# Altium PCB MCPS Supply 030601.PcbDoc
Units mm, origin at the board's own origin, x right, y up, seen from the top; angles counter-clockwise.
Board outline 142.99 x 138.8 mm, 2 copper layers (Top Layer, Bottom Layer); 73 components, 47 nets, 185 pads, 18 vias.
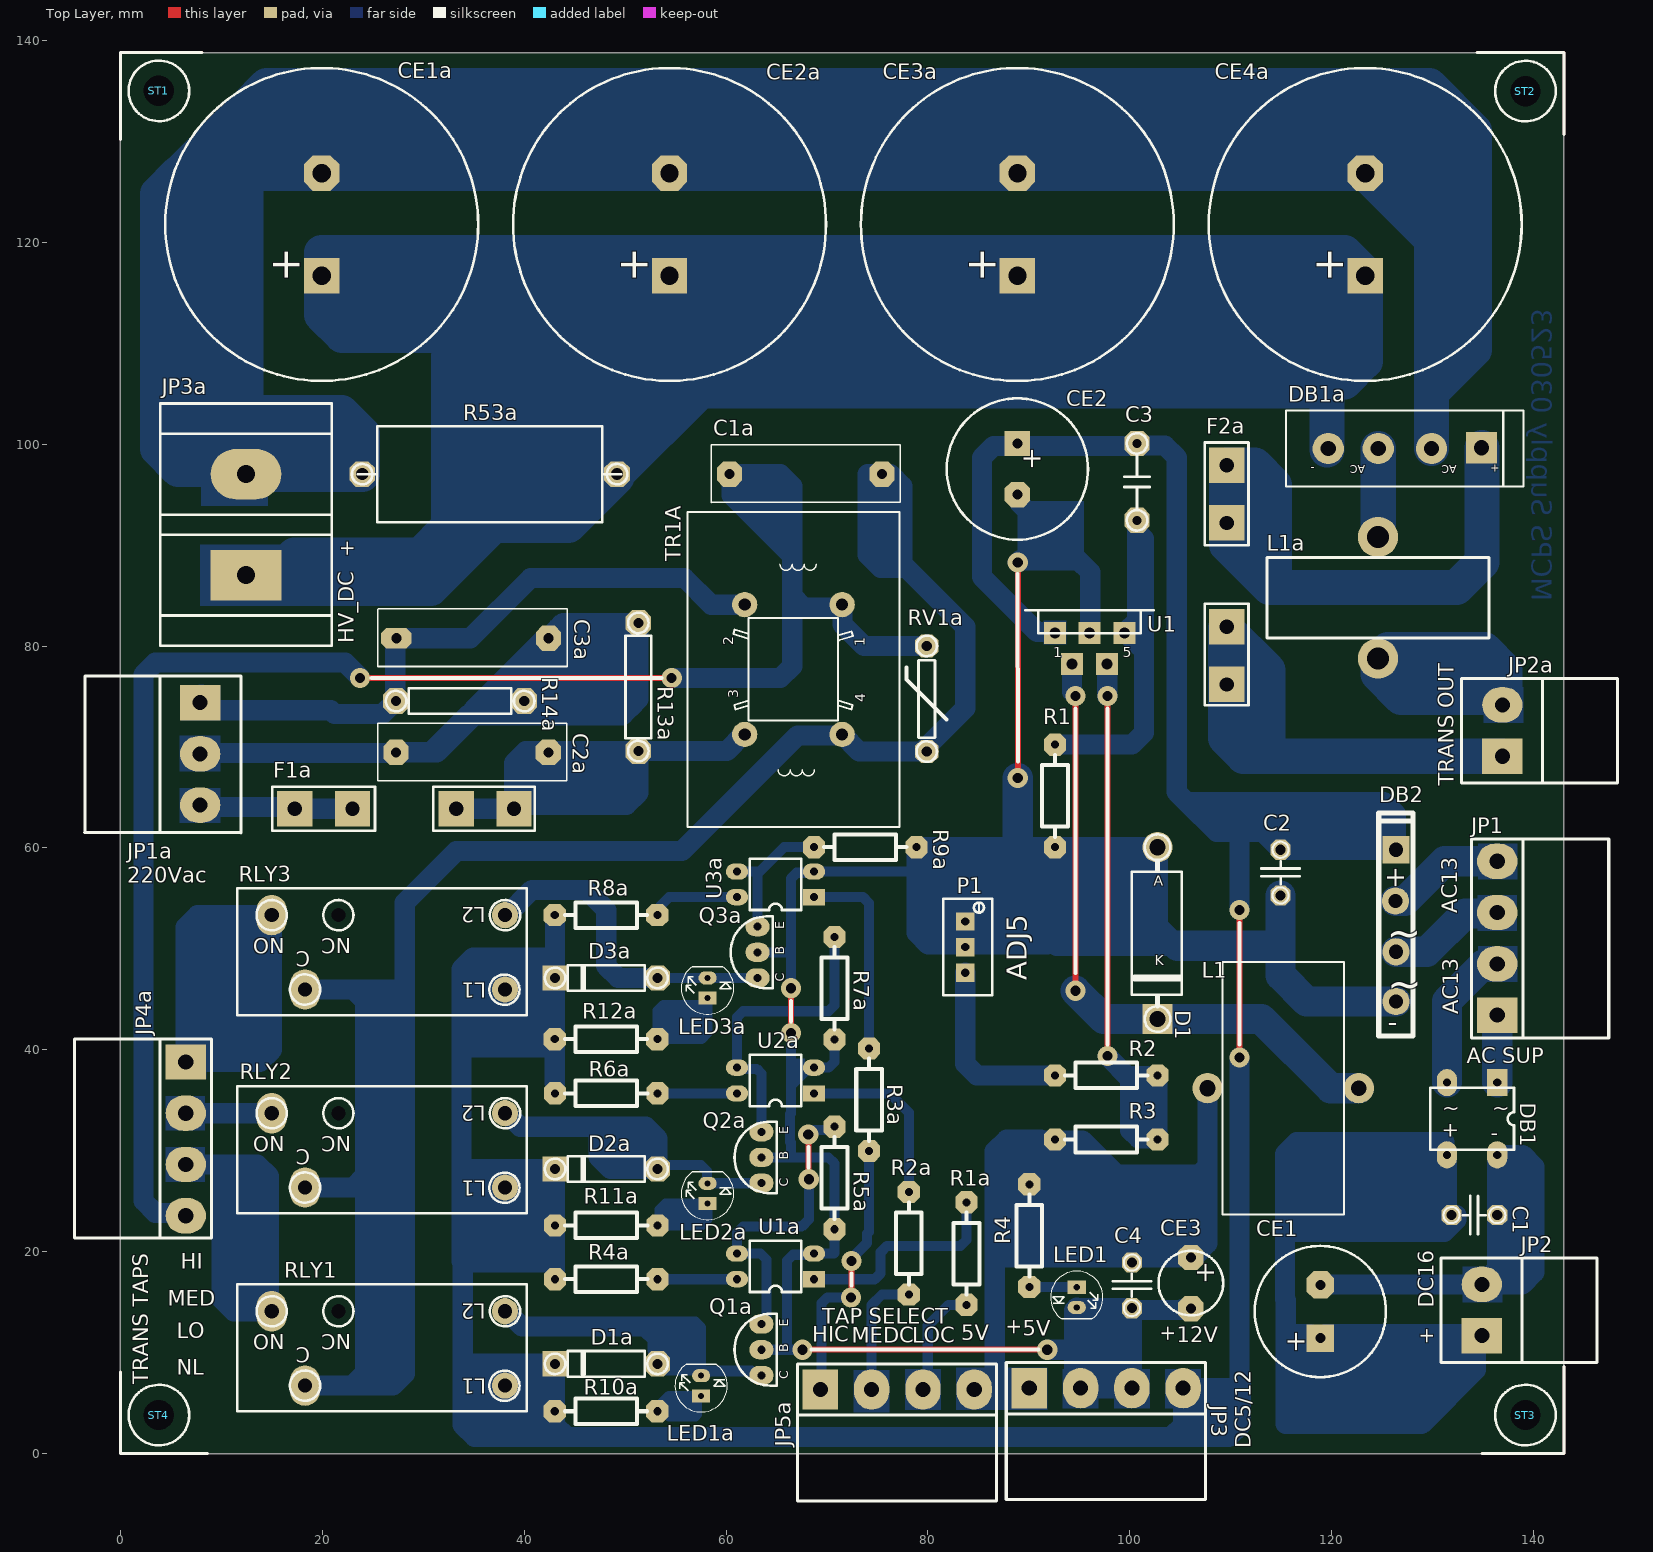
[diagram p0: Top Layer view]
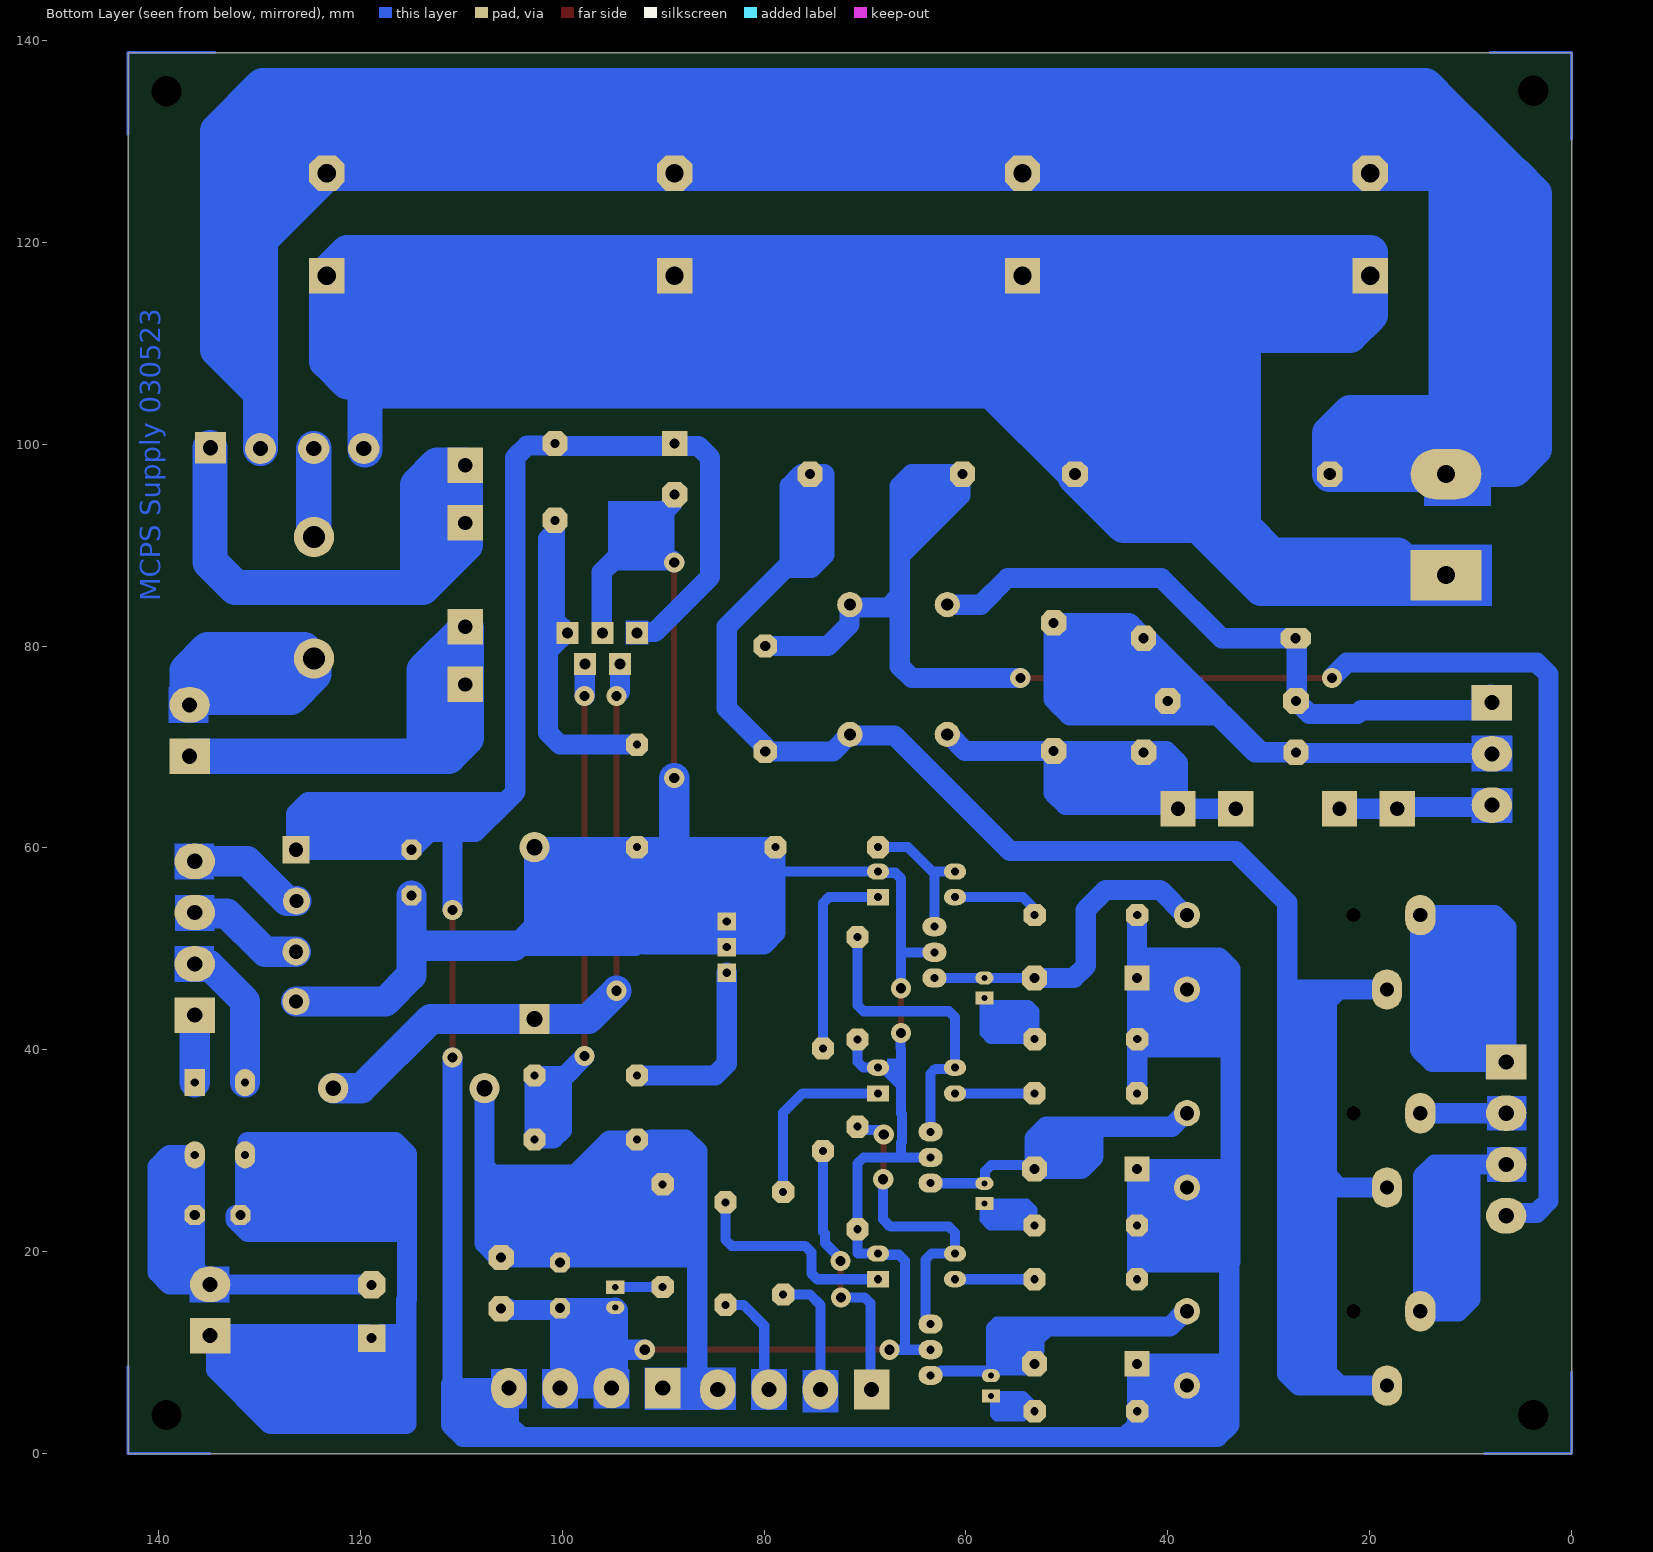
[diagram p1: Bottom Layer view, seen from below]

## Layer stack, top to bottom
Top Solder: solder mask 0.0102, Solder Resist, Dk 3.5
Top Layer: signal copper 0.0356
Dielectric1: dielectric 0.32, FR-4, Dk 4.8
Bottom Layer: signal copper 0.0356
Bottom Solder: solder mask 0.0102, Solder Resist, Dk 3.5

## Board outline
0,0 142.989,0 142.989,138.797 0,138.797

## Design rules (kind name [scope] priority, off if disabled: settings)
Clearance [All] p1: gap=0.3 ignorepadtopadclearanceinfootprint=FALSE except(0.5: Arc-Arc Arc-Track Track-Track)
ComponentClearance [All] p1 off: gap=0.254 collisioncheckmode=3 verticalgap=0.254 showdistances=FALSE
PolygonConnect [All] p1: connectstyle=Direct reliefconductorwidth=1 reliefentries=4 polygonreliefangle="90 Angle" airgapwidth=0.3
RoutingVias [All] p1: holewidth=0.711 width=1.27 viastyle="Through Hole" minholewidth=0.711 minwidth=1.27 maxholewidth=0.711 maxwidth=1.27
SilkToSolderMaskClearance SilkscreenOverComponentPads [IsPad] p1: minsilkscreentomaskgap=0.254 clearancetoexposedcopper=TRUE
SolderMaskExpansion [All] p1: expansion=0.102 istentingtop=FALSE
UnRoutedNet [All] p1: checkbadconnections=TRUE
Width [All] p1: maxlimit=5 minlimit=0.3 preferedwidth=0.7 minimp=50.000000 maximp=50.000000 favimp=50.000000
27 further rules are at their usual default settings.

## Components (designator, comment, footprint, x,y, rotation, side; value= is the part's Value field where it differs from the comment)
C1 "100N" c1.8p 131.877,23.622 r0 top locked
C1a "47N/275" 47N/275#1 75.438,97.028 r0 top locked
C2 "100N" c1.8p 114.935,59.817 r270 top locked
C2a "47N/275" 47N/275#1 42.393,69.469 r0 top locked
C3 "100N" C3P 100.711,100.076 r270 top locked
C3a "47N/275" 47N/275#2 42.418,80.772 r0 top locked
C4 "100N" c1.8p 100.203,18.923 r270 top locked
CE1 "1000M/25" CAP1000M/25V 118.872,14.072 r180 top locked
CE1a "1200M/250V" "CAP 1200M/250" 19.939,121.766 r180 top locked
CE2 "2200M/25" "CAP 2200/25" 88.858,100.076 r0 top locked
CE2a "1200M/250V" "CAP 1200M/250" 54.398,121.766 r180 top locked
CE3 "1000M/63" CAP2P 106.045,19.431 r0 top locked
CE3a "1200M/250V" "CAP 1200M/250" 88.858,121.766 r180 top locked
CE4a "1200M/250V" "CAP 1200M/250" 123.317,121.766 r180 top locked
D1 "1N5822" d54 102.743,60.071 r0 top locked
D1a "1N5819" D4P 53.213,8.89 r0 top locked
D2a "1N5819" D4P 53.213,28.194 r0 top locked
D3a "1N5819" D4P 53.213,47.117 r0 top locked
DB1 "200V/1A" "BRG 1A" 133.909,33.172 r0 top locked
DB1a "600V/6A" "BRIDGE 6A" 127.254,99.568 r180 top locked
DB2 "200V/2A" "BRG GBU" 126.365,44.78 r0 top locked
F1a "1A5" FS 17.272,63.881 r0 top locked
F2a "5A" FS 109.601,97.917 r270 top locked
JP1 "AC SUP" 4EDG 136.398,43.434 r270 top locked
JP1a "220Vac" 3EDG-STR 7.874,74.422 r90 top locked
JP2 "DC16" 2edg-str 134.874,11.684 r270 top locked
JP2a "TRANS OUT" 2edg-str 136.906,69.088 r270 top locked
JP3 "DC5/12" 4EDG 90.043,6.477 r180 top locked
JP3a "HV_DC" DG55X2 12.446,87.028 r90 top locked
JP4a "TRANS TAPS" 4EDG 6.477,38.798 r90 top locked
JP5a "TAP SELECT" 4EDG 69.342,6.35 r180 top locked
L1 "100UH" "inductor 2512" 115.189,36.195 r0 top locked
L1a "10mH/5A" "INDUCTOR 2208" 124.587,90.805 r0 top locked
LED1 "Red" LED-5mm 94.752,16.478 r0 top locked
LED1a "LED" LED-5mm 57.521,5.715 r180 top locked
LED2a "LED" LED-5mm 58.156,24.765 r180 top locked
LED3a "LED" LED-5mm 58.156,45.117 r180 top locked
P1 "1K" "pot multi turn" 83.693,52.695 r180 top locked
Q1a "BC337" CBE-BC546 63.5,12.827 r180 top locked
Q2a "BC337" CBE-BC546 63.5,31.877 r180 top locked
Q3a "BC337" CBE-BC546 63.119,52.197 r180 top locked
R1 "10K%" R4P 92.583,70.231 r0 top locked
R1a "560R" R4P 83.82,24.892 r0 top locked
R2 "3K%" R4P 102.743,37.465 r270 top locked
R2a "560R" R4P 78.105,25.908 r0 top locked
R3 "10K%" R4P 92.583,31.115 r90 top locked
R3a "560R" R4P 74.168,40.132 r0 top locked
R4 "1K" R4P 90.043,26.67 r0 top locked
R4a "4K7" R4P 53.213,17.272 r270 top locked
R5a "10K" R4P 70.739,32.385 r0 top locked
R6a "4K7" R4P 53.213,35.687 r270 top locked
R7a "10K" R4P 70.739,51.181 r0 top locked
R8a "4K7" R4P 53.19,53.34 r270 top locked
R9a "10K" R4P 68.707,60.071 r90 top locked
R10a "1K8" R4P 43.03,4.191 r90 top locked
R11a "1K8" R4P 43.053,22.606 r90 top locked
R12a "1K8" R4P 43.03,41.053 r90 top locked
R13a "470K" R5P 51.308,69.596 r90 top locked
R14a "470K" R5P 40.005,74.549 r180 top locked
R53a "22K/5W" R5W 36.576,97.028 r0 top locked
RLY1 "12V/10A" RLY16D 26.543,10.414 r180 top locked
RLY2 "12V/10A" RLY16D 26.543,30.035 r180 top locked
RLY3 "12V/10A" RLY16D 26.543,49.657 r180 top locked
RV1a "250Vrms" "VARISTOR 3" 79.883,80.01 r0 top locked
ST1 "STUD" CORNER 0,138.811 r0 top locked
ST2 "STUD" CORNER 143.002,138.784 r270 top locked
ST3 "STUD" CORNER 143.002,0 r180 top locked
ST4 "STUD" CORNER 0,0 r90 top locked
TR1A "CMT" CMT1 71.501,71.247 r270 top locked
U1 "LM2576T-ADJ" PENTA1 92.583,81.28 r90 top locked
U1a "PC817" DIP4 68.707,17.272 r180 top locked
U2a "PC817" DIP4 68.707,35.687 r180 top locked
U3a "PC817" DIP4 68.707,55.118 r180 top locked

## Footprints (in the part's own frame and the unit in brackets; to place one, negate y for a bottom-side part, rotate by r counter-clockwise, add the part's x,y. Pads: shape width x height; smd on the part's side, far side on the other; paste and mask are expansions set on the pad)
2edg-str [mm]
  rect 3.5x4 hole 1.5: 1(0,0)
  oval 3.5x4 hole 1.5: 2(-5.08,0)
  silkscreen extent -7.7,-4.06 2.64,11.43
3EDG-STR [mm]
  rect 3.5x4 hole 1.5: 1(-0.025,-0.025)
  oval 3.5x4 hole 1.5: 2(-5.105,-0.025) 3(-10.185,-0.025)
  silkscreen extent -12.93,-4.09 2.62,11.41
4EDG [mm]
  rect 3.5x4 hole 1.5: 1(0,0)
  oval 3.5x4 hole 1.5: 2(-5.08,0) 3(-10.16,0) 4(-15.24,0)
  silkscreen extent -17.44,-2.54 2.29,11.05
47N/275#1 [mm]
  oct 2.5x2.5 hole 1: 1(0,0) 2(-15.088,0)
  silkscreen extent -16.92,-2.81 1.83,2.9
47N/275#2 [mm]
  oct 2.5x2.5 hole 1: 1(0,0)
  oct 3x2 hole 1: 2(-15.088,0)
  silkscreen extent -16.92,-2.81 1.83,2.9
"BRG 1A" [mm]
  rect 2x2.7 hole 0.8: 1(2.489,3.581)
  oval 2x2.7 hole 0.8: 2(2.489,-3.581) 3(-2.489,3.581) 4(-2.489,-3.581)
  silkscreen extent -4.15,-3.09 4.15,3.07
"BRG GBU" [mm]
  round 2.7 hole 1.4: 1(0,4.928) 2(0,0) 3(-0.051,9.957)
  rect 2.7x2.7 hole 1.4: 4(0,15.037)
  silkscreen extent -1.7,-3.41 1.7,18.69
"BRIDGE 6A" [mm]
  rect 3.1x3.1 hole 1.5: 1(-7.595,-0.076)
  round 3.1 hole 1.5: 2(-2.642,0) 3(2.642,0) 4(7.595,0)
  silkscreen extent -11.74,-3.75 11.76,3.75
c1.8p [mm]
  oct 2x2 hole 1: 1(0,0) 2(4.521,0)
  silkscreen extent -0.8,-1.91 5.32,1.9
C3P [mm]
  oct 2.5x2.5 hole 0.9: 1(0,0) 2(7.62,0)
  silkscreen extent -1.02,-1.27 8.64,1.27
CAP2P [mm]
  oct 2.5x2.5 hole 1: 1(0,0) 2(0,-5.08)
  silkscreen extent -3.2,-5.74 3.2,0.66
CAP1000M/25V [mm]
  rect 2.7x2.7 hole 1: 1(0,2.642)
  oct 2.7x2.7 hole 1: 2(0,-2.642)
  silkscreen extent -6.5,-6.5 6.5,6.5
"CAP 1200M/250" [mm]
  rect 3.5x3.5 hole 1.8: 1(0,5.08)
  oct 3.5x3.5 hole 1.8: 2(0,-5.08)
  silkscreen extent -15.5,-15.5 15.5,15.5
"CAP 2200/25" [mm]
  rect 2.5x2.5 hole 1: 1(0,0)
  oct 2.5x2.5 hole 1: 2(0,-5.08)
  silkscreen extent -7,-9.54 7,4.46
CBE-BC546 [mm]
  oval 2.4x1.9 hole 0.8: 1(0,2.54) 2(0,0) 3(0,5.08)
  silkscreen extent -1.52,-1.02 2.67,6.1
CMT1 [mm]
  round 2.5 hole 1.2: 1(-12.852,0) 2(-12.852,-9.652) 3(0,-9.652) 4(0,0)
  silkscreen extent -22.02,-15.34 9.17,5.69
CORNER [mm]
  round 2 hole 3: 1(3.81,-3.81)
  Multi-Layer lines w0.3: 0,-8.623 0,0.013 8.09,0.013
  silkscreen extent 0,-8.62 8.09,0.01
D4P [mm]
  oct 2.5x2.5 hole 1: 1(0,0)
  rect 2.5x2.5 hole 1: 2(-10.16,0)
  silkscreen extent -11.17,-1.27 1.02,1.27
d54 [mm]
  round 3 hole 1.6: 1(0,0)
  rect 3x3 hole 1.6: 2(0,-17.018)
  silkscreen extent -2.54,-18.29 2.41,1.27
DG55X2 [mm]
  rect 5x7 hole 1.8: 1(0,0)
  oval 5x7 hole 1.8: 2(10,0)
  silkscreen extent -7,-8.5 17,8.5
DIP4 [mm]
  rect 2.2x1.6 hole 0.8: 1(0,0)
  oval 2.2x1.6 hole 0.8: 2(0,-2.54) 3(7.62,-2.54) 4(7.62,0)
  silkscreen extent 1.27,-3.81 6.35,1.27
FS [mm]
  rect 3.5x3.5 hole 1.4: 1(0,0) 2(21.717,0) ""(5.715,0) ""(16.002,0)
  silkscreen extent -2.25,-2.16 23.76,2.16
"INDUCTOR 2208" [mm]
  round 4 hole 2.2: 1(0,0) 2(0,-12.04)
  silkscreen extent -11,-10.01 11,-2.03
"inductor 2512" [mm]
  round 3 hole 1.6: 1(-7.493,0)
  round 3 hole 1.5: 2(7.493,0)
  silkscreen extent -6.02,-12.52 6.02,12.52
LED-5mm [mm]
  rect 1.8x1.3 hole 0.6: 1(-0.01,0)
  oval 1.8x1.3 hole 0.6: 2(-0.01,-2)
  silkscreen extent -2.61,-3.13 2.59,1.6
PENTA1 [mm]
  rect 2.2x2.2 hole 1.1: 1(0,0) 2(-3.048,-1.702) 3(0,-3.429) 4(-3.048,-5.156) 5(0,-6.883)
  silkscreen extent 0,-9.78 2.29,2.92
"pot multi turn" [mm]
  rect 1.8x1.8 hole 0.8: 1(0,5.06) 2(0,0) 3(0,2.53)
  silkscreen extent -2.67,-2.29 2.18,7.29
R4P [mm]
  oct 2.2x2.2 hole 0.8: 1(0,0) 2(0,-10.16)
  silkscreen extent -1.27,-9.14 1.27,-1.02
R5P [mm]
  oct 2.54x2.54 hole 1: 1(0,0) 2(12.7,0)
  silkscreen extent -1.02,-1.27 13.72,1.27
R5W [mm]
  oct 2.54x2.54 hole 1.2: 1(-12.624,0) 2(12.624,0)
  silkscreen extent -13.64,-4.75 13.64,4.75
RLY16D [mm]
  oval 3x4 hole 1.4: 1(8.255,3.683) 2(11.557,-3.683)
  round 1 hole 1.4: 3(4.953,-3.683)
  round 2.6 hole 1.4: 4(-11.557,-3.683) 5(-11.557,3.683)
  silkscreen extent -13.72,-6.35 14.99,6.22
"VARISTOR 3" [mm]
  oct 2.3x2.3 hole 1: 1(0,-10.465) 2(0,0)
  silkscreen extent -2.01,-11.48 1.95,1.02

## Part data
C1 C1a C2 C2a C3 C3a C4: library part C
CE1 CE1a CE2 CE2a CE3 CE3a CE4a: library part E
D1: library part Diode, "Default Diode", Code_JEDEC=DO-214-AB, LatestRevisionDate=17-Jul-2002, LatestRevisionNote="Re-released for DXP Platform.", PackageDescription="DO-214-AB/SMC; 2 C-Bend Leads; Body 7.9 x 5.9 mm, inc. leads (LxW)", PackageReference=SMC, PackageVersion=Sep-1996, Published=8-Jun-2000, Publisher="Altium Limited"
D1a D2a D3a: library part D
DB1 DB1a DB2: library part BRIDGE
F1a F2a: library part FUSE1
JP1 JP3 JP4a JP5a: library part "Header 4", "Header, 4-Pin", LatestRevisionDate=17-Jul-2002, LatestRevisionNote="Re-released for DXP Platform.", Publisher="Altium Limited"
JP1a: library part "Header 3", "Header, 3-Pin", LatestRevisionDate=17-Jul-2002, LatestRevisionNote="Re-released for DXP Platform.", Publisher="Altium Limited"
JP2 JP2a JP3a: library part "Header 2", "Header, 2-Pin", LatestRevisionDate=17-Jul-2002, LatestRevisionNote="Re-released for DXP Platform.", Publisher="Altium Limited"
L1: library part "INDUCTOR IRON"
L1a: library part INDUCTOR
LED1: library part LED, "LED", Adding Date=1387/12/22, Color=Red, Designer="Saeid Jorablo", Organazation=ControTec, Size="SMD 1206"
LED1a LED2a LED3a: "LED LIGHTING", Data=16-12-2016, Designer="Abbas Basereh"
P1: library part POT2
Q1a Q2a Q3a: library part N
R1 R1a R2 R2a R3 R3a R4 R4a R5a R6a R7a R8a R9a R10a R11a R12a R13a R14a R53a: library part R
RLY1 RLY2 RLY3: library part RELAY-SPST4
RV1a: library part VARISTOR
TR1A: library part TRANS1
U1: library part LM2576
U1a U2a U3a: library part OPTODIP4

## Via types
v1: diameter 2, hole 1, Top Layer to Bottom Layer, 18 vias

## Nets (pads, with @x,y where several pads share a name; then routed paths per layer and width w, separated by ;. In a path a pad name is that pad's centre, name@x,y a point inside that pad or via, vN(x,y) a via of type N, cw(c..) or ccw(c..) an arc to the next point about the centre after c; other vN are vias at no path point)
5V: C4.1 CE3.1 JP3.1 JP5a.4 L1.1 R3.1 R4.1 | length 132.3
  Bottom Layer w2: JP5a.4 84.645,6.413 86.868,6.413 ; 86.868,6.858 89.662,6.858 JP3.1 ; 87.312,6.413 86.614,7.112 86.614,19.177 ; 91.191,31.115 87.786,31.115 86.614,29.943 86.614,25.398 ; 96.462,23.79 94.615,25.636 94.615,31.015 ; L1.1 107.696,28.448 ; 86.614,19.177 86.614,25.398 ; 86.614,19.177 86.868,19.431 93.726,19.431 ; 86.614,25.398 87.786,26.57 89.943,26.57 R4.1 ; R4.1 90.019,26.694 90.019,29.843 91.191,31.015 92.483,31.015 R3.1 92.683,31.015 94.615,31.015 ; R4.1 90.043,23.114 93.726,19.431 ; 93.726,19.431 99.695,19.431 C4.1 ; 94.615,31.015 95.326,31.015 98.726,27.615 100.203,27.615 ; C4.1 100.203,25.781 ; C4.1 100.711,19.431 105.795,19.431 105.918,19.554 105.918,19.558 CE3.1 106.256,19.642 106.524,19.642 107.696,20.813 107.696,25.781 ; 100.203,25.781 100.203,27.615 ; 100.203,25.781 107.696,25.781 ; 100.203,27.615 106.863,27.615 107.696,28.448 ; 107.696,25.781 107.696,28.448
12V: C2.1 C3.1 CE2.1 D1a.2 D2a.2 D3a.2 DB2.4 JP3.4 R4a.2 R6a.2 R8a.2 R10a.1 R11a.1 R12a.1 RLY1.5 RLY2.5 RLY3.5 U1.1 | length 451.3
  Top Layer w0.6: v1(110.871,39.243) v1(110.871,53.848)
  Bottom Layer w2: RLY1.5 38.1,5.363 39.272,4.191 ; R8a.2 43.042,53.328 43.042,49.022 ; R12a.1@43.042,41.053 43.042,47.117 39.405,47.117 38.262,45.974 RLY3.5 38.1,42.224 39.272,41.053 R12a.1 ; D3a.2@43.042,47.882 43.042,49.022 ; R4a.2 43.053,18.923 ; R6a.2 43.053,36.703 43.03,36.726 R12a.1 ; U1.1 92.483,81.38 90.832,81.38 85.344,86.868 85.344,98.654 86.516,99.826 88.608,99.826 CE2.1 89.108,99.826 90.193,99.826 90.197,99.822 100.418,99.822 100.672,100.076 C3.1 100.922,99.865 103.476,99.865 104.648,98.694 104.648,65.532 105.639,64.541 ; v1(110.871,39.243) 110.871,6.731 ; v1(110.871,53.848) 110.871,61.595 ; 110.998,6.477 110.998,2.823 109.826,1.651 104.111,1.651 ; 110.998,6.858 110.871,6.731 ; 33.782,23.778 33.782,28.321 ; 33.782,23.778 33.782,19.05 33.909,18.923 ; 33.782,23.778 34.954,22.606 39.272,22.606 ; 33.782,28.321 33.909,28.194 D2a.2 ; 33.782,28.321 33.782,40.259 ; 33.782,40.259 33.782,47.977 34.954,49.149 42.915,49.149 43.042,49.022 ; 33.782,40.259 42.236,40.259 R12a.1 ; 33.909,5.236 33.909,2.823 35.081,1.651 44.225,1.651 ; 33.909,5.236 34.954,4.191 39.272,4.191 ; 33.909,5.236 33.909,9.398 ; 33.909,9.398 34.417,8.89 D1a.2 ; 33.909,9.398 33.909,18.923 ; 33.909,18.923 43.053,18.923 ; 39.272,4.191 R10a.1 R10a.1@43.042,4.202 ; 39.272,22.606 R11a.1 ; 39.272,22.606 38.1,23.778 RLY2.5 38.215,26.467 40.056,26.467 41.572,27.983 42.842,27.983 D2a.2 ; R10a.1@43.042,4.202 R10a.1@43.053,4.214 ; R10a.1@43.042,4.202 43.042,8.879 D1a.2 ; R10a.1@43.053,4.214 43.053,2.823 44.225,1.651 ; R10a.1@43.053,4.214 D1a.2 ; 43.053,18.923 R11a.1 ; R11a.1 D2a.2 ; 44.225,1.651 104.111,1.651 ; 104.111,1.651 105.283,2.823 JP3.4 110.617,6.477 110.871,6.731 ; 105.639,64.541 125.193,64.541 126.365,63.37 DB2.4 C2.1 113.157,61.595 110.871,61.595 ; 105.639,64.541 108.585,61.595 110.871,61.595
16V: C1.1 CE1.1 DB1.4 JP2.1 | length 124.7
  Bottom Layer w2: 118.745,25.4 115.372,22.027 ; 121.391,27.571 124.956,27.571 126.365,26.162 ; 121.856,29.654 123.063,30.861 ; DB1.4@131.07,29.941 131.42,29.941 DB1.4 131.42,24.079 C1.1 ; DB1.4@131.162,30.861 123.063,30.861 ; C1.1@132.334,23.622 132.334,23.143 131.162,21.971 115.824,21.971 115.372,21.519 ; 115.372,21.519 115.372,22.027 ; 115.372,21.519 115.372,15.263 115.443,15.192 115.443,11.811 ; 115.372,22.027 115.372,29.689 116.544,30.861 123.063,30.861 ; 115.443,11.811 115.443,2.921 128.905,2.921 134.275,8.291 134.275,11.085 JP2.1 134.874,11.811 119.342,11.811 118.961,11.43 CE1.1 118.611,11.691 118,11.691 117.88,11.811 115.443,11.811
ERTH: C2a.2 C3a.1 JP1a.2 R13a.2 R14a.1 | length 105.4
  Bottom Layer w2: JP1a.2 7.976,69.393 27.229,69.393 C2a.2 30.734,69.469 ; 34.989,73.723 37.37,76.105 40.005,78.74 ; 35.306,73.406 31.369,69.469 30.734,69.469 ; C3a.1 42.207,80.561 41.826,80.561 40.957,79.692 40.005,78.74 ; C3a.1@42.629,80.983 42.629,81.085 43.319,81.776 43.84,82.296 R13a.2@51.259,82.296 ; R13a.2 51.308,75.721 ; 30.734,69.469 34.417,73.152 35.56,73.152 39.878,73.152 ; 39.878,73.152 49.755,73.152 50.136,73.533 ; 39.878,73.152 40.259,73.533 50.136,73.533 ; 40.005,78.74 R14a.1 50.136,74.549 50.8,75.213 51.308,75.721 ; 50.136,73.533 50.644,74.041 51.308,74.705 51.308,75.721
GND5: C2.2 C4.2 CE2.2 CE3.2 D1.1 DB2.2 JP3.2 JP3.3 LED1.2 P1.2 P1.3 Q1a.1 Q2a.1 Q3a.1 R1.2 R5a.2 R7a.2 R9a.2 U1.3 U1a.2 U2a.2 U3a.2 | length 305.3
  Top Layer w0.6: v1(66.421,41.656) v1(66.421,46.101) ; v1(67.564,10.287) v1(91.821,10.287) ; v1(88.9,66.929) v1(88.9,88.265)
  Bottom Layer w1: Q3a.1 66.294,49.657 ; Q1a.1 66.04,10.287 ; Q2a.1 66.421,29.337 ; v1(66.421,41.656) 66.473,41.604 66.473,40.161 66.421,40.11 66.421,36.432 ; v1(66.421,46.101) 66.421,49.53 66.294,49.657 ; v1(67.564,10.287) 66.04,10.287 ; R7a.2 70.739,38.813 70.153,38.227 U2a.2 68.592,38.112 68.101,38.112 66.421,36.432 ; 78.867,57.658 U3a.2 68.592,57.543 67.007,57.543 66.421,56.957 66.421,49.784 66.294,49.657 ; 94.107,10.287 94.488,10.668 ; U1.3 U1.3@96.071,81.221 ; 66.04,10.287 66.04,19.111 66.626,19.697 68.592,19.697 U1a.2 70.7,19.812 70.739,19.851 R5a.2 70.739,28.751 70.153,29.337 66.421,29.337 ; 66.421,29.337 66.421,30.801 66.345,30.877 66.345,33.617 66.421,33.693 66.421,36.432
  Bottom Layer w2: CE2.2 89.068,94.785 89.068,94.141 92.148,91.061 92.148,90.794 ; v1(88.9,88.265) 89.138,88.503 89.858,88.503 92.148,90.794 ; 89.154,57.785 88.9,58.039 88.9,60.071 ; 91.812,50.419 80.039,50.419 78.867,51.591 78.867,57.658 R9a.2 88.9,60.071 ; v1(91.821,10.287) 94.107,10.287 ; 92.148,90.927 92.148,90.794 ; 92.583,52.705 92.583,54.737 ; 92.724,50.316 104.751,50.316 102.761,52.306 102.761,60.053 D1.1 R1.2 ; LED1.2@94.742,14.402 C4.2 ; LED1.2 94.488,14.224 94.488,10.668 94.488,7.768 95.123,7.133 JP3.2 JP3.3 100.203,6.858 100.33,6.985 100.203,7.112 100.203,14.224 105.156,14.224 105.283,14.351 CE3.2 ; 94.964,55.067 94.818,55.067 94.488,54.737 92.583,54.737 ; 96.083,82.55 96.083,87.331 94.911,88.503 94.439,88.503 92.148,90.794 ; 114.262,50.316 114.935,49.644 ; 88.9,60.071 R1.2 ; 92.583,54.737 R1.2
  Bottom Layer w3: 88.9,60.071 v1(88.9,66.929) ; 104.751,50.316 114.262,50.316 ; C2.2 114.935,49.644 114.935,47.371 117.526,44.78 DB2.2
HI: JP4a.1 RLY3.2 | length 44.7
  Bottom Layer w2: JP4a.1 13.814,38.798 14.986,39.97 RLY3.2 7.649,53.34 6.477,52.168 JP4a.1
HIC: JP5a.1 R3a.2 | length 27
  Top Layer w0.6: v1(72.39,15.472) 72.416,15.498 72.416,19.046 v1(72.442,19.072)
  Bottom Layer w1: JP5a.1 69.462,6.47 69.462,14.886 70.048,15.472 v1(72.39,15.472) ; v1(72.442,19.072) 72.442,19.343 73.977,20.878 73.977,21.78 74.168,21.971 R3a.2
HV: CE1a.1 CE2a.1 CE3a.1 CE4a.1 DB1a.4 JP3a.1 R53a.2 | length 462.5
  Bottom Layer w3.5: 30.797,112.286 32.639,110.444 32.639,107.315 ; 32.512,89.078 32.512,91.821 ; 71.247,115.252 52.763,111.995 52.403,111.995 49.276,112.091 ; DB1a.4@119.536,99.441 119.536,106.172 ; 32.512,91.821 32.512,107.315 32.512,108.712 39.306,108.712 49.276,108.712 49.276,112.091 ; 32.512,91.821 29.718,89.027 17.246,89.027 16.497,88.278 15.196,88.278 13.946,87.028 JP3a.1 13.696,85.778 17.193,85.778 17.246,85.725 30.734,85.725 36.957,91.948 44.374,91.948 49.2,96.774 R53a.2 57.455,105.283 118.647,105.283 119.536,106.172 ; 49.276,112.091 34.544,112.542 34.544,110.762 21.989,110.762 19.939,112.813 19.939,118.981 121.023,118.981 ; 49.276,112.091 49.276,116.178 48.768,116.686 CE2a.1 71.247,116.686 CE3a.1 CE4a.1@121.586,116.686 ; 119.536,106.172 121.267,106.172 123.317,108.222 123.317,116.93 121.267,118.981 121.023,118.981 ; 119.536,106.172 119.536,114.636 CE4a.1@121.586,116.686 ; 121.023,118.981 CE4a.1 CE4a.1@121.586,116.686
LO: JP4a.3 RLY1.2 | length 41
  Bottom Layer w2: JP4a.3 10.033,28.639 ; 10.033,28.639 13.56,28.639 14.732,27.467 14.732,15.558 14.795,15.495 14.795,14.288 RLY1.2 11.205,14.097 10.033,15.269 10.033,28.639
LOC: JP5a.3 R1a.2 | length 11.2
  Bottom Layer w1: JP5a.3 79.98,6.828 79.98,12.67 82.042,14.732 R1a.2
MED: JP4a.2 RLY2.2 | length 8.5
  Bottom Layer w2: JP4a.2 RLY2.2
MEDC: JP5a.2 R2a.2 | length 12.5
  Bottom Layer w1: JP5a.2 74.422,14.732 75.438,15.748 R2a.2
NetC1_2: C1.2 CE1.2 DB1.2 JP2.2 | length 49.9
  Bottom Layer w2: CE1.2 118.897,16.739 133.96,16.739 134.112,16.891 134.239,16.764 JP2.2 ; JP2.2 138.909,16.764 140.081,17.936 140.081,28.419 138.909,29.591 DB1.2 C1.2 136.398,18.288 JP2.2
NetC2a_1: C2a.1 F1a.2 F1a.@33.274,63.881 R13a.1 TR1A.3 | length 56.6
  Bottom Layer w2: F1a.@33.274,63.881 F1a.2 ; C2a.1 42.405,69.456 42.405,64.275 42.418,64.262 ; R13a.1@51.301,69.589 51.301,65.434 50.13,64.262 42.418,64.262 ; TR1A.3 61.714,71.247 60.063,69.596 R13a.1 40.161,69.596 38.989,68.424 F1a.2 ; F1a.2 39.116,63.881 39.497,64.262 42.418,64.262
NetC3_2: C3.2 R1.1 U1.5 | length 44.5
  Bottom Layer w2: R1.1 92.57,70.244 100.23,70.244 101.402,71.415 101.402,80.008 ; U1.5 U1.5@99.554,81.367 ; C3.2@100.711,92.417 C3.2@100.711,91.313 ; 101.346,83.16 100.711,82.525 ; U1.5@99.554,81.367 100.913,80.008 101.402,80.008 ; U1.5@99.554,81.367 100.711,82.525 ; 100.711,82.525 C3.2@100.711,91.313 ; C3.2@100.711,91.313 101.402,90.622 101.402,83.16 101.402,80.008
NetC3a_2: C3a.2 JP1a.1 R14a.2 TR1A.2 | length 64.8
  Bottom Layer w2: JP1a.1 8.649,73.647 20.841,73.647 21.209,73.279 25.986,73.279 27.256,74.549 R14a.2 27.229,74.625 27.229,80.67 C3a.2 ; C3a.2@27.37,80.772 34.671,80.772 40.64,86.741 55.88,86.741 58.522,84.099 TR1A.2
  Bottom Layer w3.5: JP1a.1 7.976,74.397 JP1a.1@8.001,74.422
NetD1_2: D1.2 L1.2 U1.2 | length 64.6
  Top Layer w0.6: v1(94.615,45.847) v1(94.615,75.057)
  Bottom Layer w1: v1@94.28,75.465 94.615,75.13 v1(94.615,75.057) ; U1.2@94.28,78.227 U1.2
  Bottom Layer w2: v1@94.28,75.465 U1.2@94.28,78.227
  Bottom Layer w3: v1(94.615,45.847) 97.409,43.053 D1.2 113.03,43.053 119.888,36.195 L1.2
NetD1a_1: D1a.1 LED1a.2 Q1a.3 RLY1.4 | length 46.5
  Bottom Layer w1: 51.53,13.081 56.945,13.081 57.531,12.495 LED1a.2@57.531,8.215 ; 53.213,10.287 D1a.1 53.802,8.301 56.945,8.301 LED1a.2@57.031,8.215 ; Q1a.3 63.006,7.747 Q1a.3@62.625,8.128 ; LED1a.2@57.031,8.215 LED1a.2 ; LED1a.2@57.031,8.215 LED1a.2@57.531,8.215 ; LED1a.2 LED1a.2@57.531,8.215 ; LED1a.2 57.862,7.715 58.275,8.128 Q1a.3@62.625,8.128 ; LED1a.2@57.531,8.215 62.538,8.215 Q1a.3@62.625,8.128
  Bottom Layer w2: RLY1.4 38.262,14.097 39.786,12.573 52.041,12.573 53.213,11.401 53.213,10.287
NetD2a_1: D2a.1 LED2a.2 Q2a.3 RLY2.4 | length 40.3
  Bottom Layer w1: D2a.1 53.594,28.575 57.514,28.575 58.1,27.989 58.1,26.831 LED2a.2 58.182,26.781 63.484,26.781 Q2a.3
  Bottom Layer w2: RLY2.4 38.262,33.718 39.596,32.385 52.041,32.385 53.213,31.213 D2a.1 48.543,28.194 47.371,29.366 47.371,32.258
NetD3a_1: D3a.1 LED3a.2 Q3a.3 RLY3.4 | length 32.9
  Bottom Layer w1: D3a.1 LED3a.2 Q3a.3
  Bottom Layer w2: RLY3.4 38.262,53.34 40.762,55.84 46.152,55.84 48.133,53.859 48.133,48.289 49.305,47.117 D3a.1
NetDB1_1: DB1.1 JP1.1 | length 6.7
  Bottom Layer w3: DB1.1 JP1.1
NetDB1_3: DB1.3 JP1.2 | length 14.6
  Bottom Layer w3: DB1.3 131.42,44.82 135.018,48.418 136.302,48.418 JP1.2
NetDB1a_1: DB1a.1 F2a.1 F2a.@109.601,92.202 | length 63.2
  Bottom Layer w3.5: DB1a.1@134.896,99.644 134.896,88.33 132.37,85.805 113.839,85.805 ; 113.839,85.805 114.339,86.305 114.339,95.954 112.377,97.917 F2a.1 109.601,92.202 109.601,90.043 113.839,85.805
NetDB1a_3: DB1a.3 L1a.1 | length 8.8
  Bottom Layer w3.5: L1a.1 124.612,90.83 DB1a.3
NetDB2_1: DB2.1 JP1.3 | length 11.6
  Bottom Layer w3: DB2.1 129.418,49.708 133.208,53.498 136.302,53.498 JP1.3
NetDB2_3: DB2.3 JP1.4 | length 11.7
  Bottom Layer w3: DB2.3 127.254,54.737 131.191,58.674 JP1.4
NetF1a_1: F1a.1 F1a.@22.987,63.881 JP1a.3 | length 15.2
  Bottom Layer w2: JP1a.3 7.912,64.249 8.103,64.059 17.094,64.059 F1a.1 F1a.@22.987,63.881
NetF2a_2: F2a.2 F2a.@109.601,81.915 JP2a.1 | length 53.7
  Bottom Layer w3.5: F2a.@109.601,81.915 F2a.@109.474,81.788 ; JP2a.1 114.935,69.088 113.665,69.088 ; F2a.@109.474,81.788 113.665,77.597 113.665,69.088 ; F2a.@109.474,81.788 109.474,80.137 109.474,76.2 109.474,70.884 111.27,69.088 113.665,69.088
NetJP2a_2: JP2a.2 L1a.2 | length 32.6
  Bottom Layer w3.5: L1a.2@124.587,77.23 126.887,74.93 135.894,74.93 136.656,74.168 137.156,74.168 137.156,74.668 137.167,74.679 137.167,77.579 135.117,79.629 125.586,79.629 124.722,78.765 L1a.2 L1a.2@124.587,77.23
NetLED1_1: LED1.1 R4.2 | length 4.7
  Bottom Layer w1: R4.2 90.059,16.494 94.726,16.494 LED1.1
NetLED1a_1: LED1a.1 R10a.2 | length 13.2
  Bottom Layer w1: LED1a.1 54.376,5.715 53.533,4.872 53.533,4.534 R10a.2 53.533,3.848 54.211,3.848 54.376,3.683 55.499,3.683 ; 55.499,3.683 56.409,4.593 57.131,5.315 57.131,3.869 56.945,3.683 55.499,3.683
NetLED2a_1: LED2a.1 R11a.2 | length 13.4
  Bottom Layer w1: R11a.2 53.411,22.804 53.411,24.179 53.997,24.765 LED2a.1 58.166,23.192 57.58,22.606 R11a.2
NetLED3a_1: LED3a.1 R12a.2 | length 16.8
  Bottom Layer w1: LED3a.1 58.166,44.323 ; 58.166,44.323 58.166,41.656 57.563,41.053 R12a.2 53.213,41.076 53.213,43.864 53.799,44.45 58.039,44.45 58.166,44.323
NetP1_1: P1.1 R2.2 | length 18.4
  Bottom Layer w2: P1.1 83.693,38.608 84.836,37.465 R2.2
NetQ1a_2: Q1a.2 R5a.1 U1a.3 | length 30.9
  Top Layer w0.6: v1(68.145,31.623) 68.145,27.232 v1(68.199,27.178)
  Bottom Layer w1: Q1a.2 63.506,12.827 63.922,13.243 63.922,13.249 64.008,13.335 64.008,19.226 63.422,19.812 U1a.3 61.087,21.893 61.673,22.479 67.486,22.479 68.199,23.192 v1(68.199,27.178) ; v1(68.145,31.623) 68.564,32.042 70.396,32.042 R5a.1
NetQ2a_2: Q2a.2 R7a.1 U2a.3 | length 30.3
  Bottom Layer w1: Q2a.2 63.5,37.641 63.029,38.112 61.202,38.112 U2a.3 61.087,43.229 61.673,43.815 70.153,43.815 70.739,44.401 R7a.1
NetQ3a_2: Q3a.2 R9a.1 U3a.3 | length 14.2
  Bottom Layer w1: U3a.3 63.324,57.658 ; Q3a.2 63.119,57.453 63.324,57.658 ; R9a.1 65.737,60.071 63.324,57.658
NetR1a_1: R1a.1 U1a.1 | length 21.7
  Bottom Layer w1: U1a.1 74.725,17.272 75.311,17.858 75.311,19.939 75.946,20.574 83.234,20.574 83.82,21.16 R1a.1
NetR2_1: R2.1 R3.2 U1.4 | length 64.6
  Top Layer w0.6: v1(97.79,39.37) v1(97.79,75.057)
  Bottom Layer w1: v1@97.765,75.082 v1(97.79,75.057) ; U1.4@97.765,78.157 U1.4@97.789,78.182 ; 100.041,35.404 101.155,34.29 102.743,34.29
  Bottom Layer w2: U1.4 97.789,78.182 U1.4@97.839,78.132 ; v1@97.765,75.082 U1.4@97.765,78.157 ; v1(97.79,39.37) 100.013,37.148 ; 100.013,37.148 100.273,37.408 100.908,37.408 ; 100.013,37.148 100.013,36.512 100.041,36.541 ; 100.013,37.148 100.041,37.119 100.041,36.541 ; 100.041,36.541 100.908,37.408 ; 100.041,36.541 100.041,35.404 100.041,32.039 100.865,31.215 102.643,31.215 R3.2 102.743,34.29 R2.1 102.686,37.408 100.908,37.408
NetR2a_1: R2a.1 U2a.1 | length 18.1
  Bottom Layer w1: U2a.1 76.2,35.687 78.105,33.782 R2a.1
NetR3a_1: R3a.1 U3a.1 | length 20.1
  Bottom Layer w1: U3a.1 73.582,55.118 74.168,54.532 R3a.1
NetR4a_1: R4a.1 U1a.4 | length 7.9
  Bottom Layer w1: R4a.1 U1a.4
NetR6a_1: R6a.1 U2a.4 | length 7.9
  Bottom Layer w1: R6a.1 U2a.4
NetR8a_1: R8a.1 U3a.4 | length 9
  Bottom Layer w1: R8a.1 53.533,53.683 53.533,54.296 54.355,55.118 U3a.4
NL: C1a.2 JP4a.4 RV1a.2 TR1A.1 | length 174.5
  Top Layer w0.6: v1(23.749,76.835) v1(54.61,76.835)
  Bottom Layer w2: JP4a.4 6.19,23.846 3.458,23.846 2.286,25.017 2.286,77.187 3.458,78.359 22.27,78.359 v1@23.604,77.025 ; v1(54.61,76.835) 65.376,76.835 66.548,78.007 66.548,84.992 ; 66.548,89.027 66.548,95.856 65.376,97.028 C1a.2 60.539,96.839 60.539,94.936 66.548,88.927 66.548,85.852 66.548,84.992 ; RV1a.2 73.66,80.01 71.541,82.129 71.541,84.059 TR1A.1 71.366,84.099 71.086,83.82 67.72,83.82 66.548,84.992
PGND: CE1a.2 CE2a.2 CE3a.2 CE4a.2 DB1a.2 JP3a.2 R53a.1 | length 447.1
  Bottom Layer w3.5: JP3a.2@12.319,97.155 11.968,97.506 5.733,97.506 3.683,99.557 3.683,103.251 ; DB1a.2 129.896,105.131 ; 3.683,103.251 3.683,124.796 5.733,126.846 5.834,126.846 ; 3.683,103.251 3.81,103.124 8.954,103.124 12.446,103.124 ; 5.834,126.846 9.248,130.261 12.446,133.459 ; 5.834,126.846 9.652,126.846 12.446,126.846 ; 12.446,103.124 12.446,99.871 JP3a.2 R53a.1 23.952,101.074 21.902,103.124 12.446,103.124 ; 12.446,103.124 12.446,126.846 ; 12.446,126.846 12.446,133.459 ; 12.446,126.846 CE1a.2 CE2a.2 CE3a.2 CE4a.2 ; 12.446,133.459 14.496,135.509 129.667,135.509 ; CE4a.2 129.896,120.268 ; CE4a.2 129.896,126.846 ; 129.667,135.509 134.112,131.064 134.112,124.796 ; 129.667,135.509 129.896,135.28 129.896,126.846 ; 129.896,105.131 129.896,120.268 ; 129.896,105.131 134.112,109.347 134.112,124.796 ; 129.896,120.268 129.896,121.666 129.896,126.846 ; 129.896,126.846 132.062,126.846 134.112,124.796
  Bottom Layer w5: JP3a.2@12.319,97.155 JP3a.2
PH: C1a.1 RLY1.1 RLY2.1 RLY3.1 RV1a.1 TR1A.4 | length 220.1
  Bottom Layer w2: RLY1.1 22.987,6.731 ; RLY2.1 23.05,26.352 24.257,27.559 ; RLY3.1@18.542,45.72 RLY3.1 23.085,45.974 ; 77.47,88.138 83.693,81.915 83.693,73.845 RV1a.1@79.393,69.545 ; RV1a.1@79.733,69.545 73.203,69.545 TR1A.4 71.405,71.151 67.087,71.151 55.626,59.69 33.274,59.69 28.165,54.581 28.165,45.974 ; 22.987,6.731 26.994,6.731 28.165,7.903 28.165,27.178 28.165,45.974 ; 22.987,6.731 24.257,8.001 24.257,27.559 ; 23.085,45.974 28.165,45.974 ; 23.085,45.974 24.257,44.802 24.257,27.559 ; 74.041,89.027 74.041,97.028 76.298,97.028 77.47,95.856 77.47,87.757 75.311,87.757 74.041,89.027
pads on no net: RLY1.3 RLY2.3 RLY3.3 ST1.1 ST2.1 ST3.1 ST4.1

## Other copper
Bottom Layer:
  rectangle net 16V: 128.905,4.826 131.826,7.493
  rectangle net 16V: 129.54,6.985 133.35,11.049
  rectangle net 16V: 115.443,3.429 130.429,12.065
  region net NL: 64.48,89.692 67.289,91.696 63.911,96.431 61.102,94.428
  rectangle net NL: 64.389,93.98 66.929,94.869
  rectangle net NL: 60.706,94.361 66.167,96.774
  region net HV: 44.885,91.241 57.658,106.172 48.285,114.19 35.512,99.259
  rectangle net HV: 33.147,91.44 45.466,112.903
  rectangle net HV: 32.004,105.156 33.274,109.474
  rectangle net HV: 33.528,105.156 122.301,110.998
  rectangle net PH: 74.168,88.138 77.089,96.266
  rectangle net PH: 24.257,7.366 27.559,9.017
  rectangle net NetC2a_1: 39.497,63.373 42.926,69.088
  rectangle net NetF2a_2: 110.617,69.723 113.665,79.375
  rectangle net NetDB1a_1: 110.744,87.249 113.919,97.282
  rectangle net LO: 10.795,14.351 14.605,28.321
  rectangle net PGND: 5.207,97.282 12.7,127.127
  region net NetJP2a_2: 138.99,75.946 135.053,75.946 135.053,72.39 138.99,72.39
  region net NetDB2_3: 138.43,60.452 134.493,60.452 134.493,56.896 138.43,56.896
  region net NetDB2_1: 138.382,55.324 134.445,55.324 134.445,51.768 138.382,51.768
  region net NetDB1_3: 138.43,50.292 134.493,50.292 134.493,46.736 138.43,46.736
  region net NetC1_2: 136.906,18.542 132.969,18.542 132.969,14.986 136.906,14.986
  region net 12V: 107.061,4.445 107.061,8.382 103.505,8.382 103.505,4.445
  region net GND5: 101.981,4.445 101.981,8.382 98.425,8.382 98.425,4.445
  region net GND5: 96.901,4.445 96.901,8.382 93.345,8.382 93.345,4.445
  rectangle net NetC3a_2: 5.969,72.644 9.906,76.073
  rectangle net HI: 4.572,37.084 8.509,40.513
  rectangle net LO: 4.445,26.924 8.382,30.353
  rectangle net MED: 4.445,32.004 8.382,35.433
  rectangle net NetF1a_1: 5.842,62.484 9.906,65.913
  rectangle net ERTH: 5.842,67.564 9.906,71.12
  rectangle net NetR2_1: 99.441,31.439 102.87,37.084
  rectangle net NetC1_2: 137.16,17.018 139.495,29.005
  rectangle net 12V: 107.95,61.468 116.078,64.262
  rectangle net 12V: 114.681,59.563 125.984,64.008
  rectangle net GND5: 66.802,37.211 67.818,39.116
  rectangle net 5V: 82.804,4.318 91.821,8.509
  rectangle net 5V: 82.804,4.318 86.614,8.255
  rectangle net MEDC: 72.644,4.064 76.2,8.255
  rectangle net LOC: 77.724,4.318 81.28,8.382
  rectangle net NetLED1a_1: 53.872,3.848 57.154,5.842
  rectangle net HI: 6.731,38.735 14.605,53.213
  rectangle net HV: 7.874,83.947 17.145,90.043
  rectangle net PGND: 8.001,93.853 14.605,100.203
  rectangle net ERTH: 42.545,74.549 51.435,82.55
  rectangle net ERTH: 36.576,73.406 39.497,76.9
  rectangle net ERTH: 40.386,74.168 44.704,80.264
  rectangle net NetC2a_1: 42.672,64.262 51.308,69.596
  rectangle net GND5: 88.858,87.503 95.439,94.352
  rectangle net 12V: 91.44,80.137 93.726,82.55
  rectangle net GND5: 79.375,50.145 102.997,60.452
  rectangle net NetLED3a_1: 53.467,41.021 58.039,44.45
  rectangle net NetD2a_1: 48.006,28.448 52.832,32.004
  rectangle net NetLED2a_1: 53.721,22.804 58.293,24.765
  rectangle net NetD1a_1: 52.959,7.715 57.531,12.827
  rectangle net 5V: 94.996,26.797 97.663,29.845
  rectangle net PGND: 127.254,124.079 128.651,125.476
  rectangle net HV: 20.193,110.236 122.301,120.269
  rectangle net 5V: 86.614,19.177 90.019,31.015
  rectangle net 5V: 87.376,19.431 91.694,26.57
  rectangle net 5V: 98.298,19.71 107.696,28.194
  rectangle net 5V: 90.805,21.082 94.615,31.015
  rectangle net 5V: 93.32,19.964 99.568,28.194
  rectangle net GND5: 95.123,6.477 100.203,14.402
  rectangle net NetJP2a_2: 124.333,75.311 136.398,78.613
  rectangle net 12V: 105.283,2.032 110.998,6.477
  rectangle net 16V: 115.697,23.368 121.856,30.861
  rectangle net PH: 24.13,8.382 28.829,45.974
  rectangle net PGND: 9.652,128.016 11.303,130.048
  rectangle net GND5: 92.964,52.705 102.752,60.062
  rectangle net 16V: 117.983,22.352 122.047,26.162
  region net 16V: 115.56,22.949 117.3,21.426 123.224,28.196 121.484,29.719
  rectangle net 16V: 121.031,21.844 131.699,30.48
  rectangle net 12V: 34.163,2.032 42.545,9.398
  rectangle net 12V: 34.417,18.796 42.799,27.686
  rectangle net 12V: 34.163,40.259 42.545,49.149
  rectangle net PGND: 8.85,97.506 23.495,102.235
  rectangle net PGND: 12.7,128.27 130.429,134.62
  rectangle net PGND: 129.667,108.458 133.223,133.985
  text "MCPS Supply 030523" at 139.827,84.455 h2 r270

## Silkscreen, mask and mechanical layers (free items; w line width, h text height)
Top Overlay:
  lines w0.4: 53.594,76.835 24.892,76.835 ; 66.421,42.799 66.421,44.831 ; 68.145,28.321 68.145,30.353 ; 68.453,10.287 90.932,10.287 ; 72.416,16.637 72.416,17.858 ; 88.858,87.122 88.9,68.58 ; 94.615,47.625 94.615,73.787 ; 97.79,40.513 97.79,73.787 ; 110.871,40.513 110.871,52.578 ; 24.892,76.835 24.892,76.835
  text "+" at 23.114,88.773 h1.52 r90
  text "HV_DC" at 23.114,80.264 h1.52 r90
  text "TRANS OUT" at 132.08,66.167 h1.52 r90
  text "220Vac" at 0.658,56.561 h1.52
  text "AC13" at 132.415,53.551 h1.52 r90
  text "ADJ5" at 89.77,46.882 h2 r90
  text "AC13" at 132.542,43.518 h1.52 r90
  text "AC SUP" at 133.356,38.654 h1.52
  text "HI" at 5.969,18.288 h1.52
  text "MED" at 4.699,14.651 h1.52
  text "DC16" at 130.129,14.424 h1.52 r90
  text "TAP SELECT" at 69.525,12.873 h1.52
  text "+" at 89.154,11.684 h1.52 r90
  text "5V" at 89.408,11.684 h1.52
  text "LO" at 5.588,11.43 h1.52
  text "5V" at 83.323,11.222 h1.52
  text "HIC" at 68.555,11.095 h1.52
  text "+" at 104.394,11.049 h1.52 r90
  text "12V" at 104.648,11.049 h1.52
  text "MEDC" at 72.438,10.968 h1.52
  text "LOC" at 78.443,10.968 h1.52
  text "+" at 130.048,10.795 h1.52 r90
  text "NL" at 5.577,7.793 h1.52
  text "TRANS TAPS" at 2.748,6.888 h1.52 r90
  text "DC5/12" at 112.004,0.54 h1.52 r90
Mechanical 1:
  the board outline again, w0.254

## Text inside footprints (layer, text, board x,y; h text height)
CE1: Top Overlay "+" at 117.323,9.957 h2 r90
CE1a: Top Overlay "+" at 17.78,116.051 h3 r90
CE2: Top Overlay "+" at 89.493,99.695 h2 r270
CE2a: Top Overlay "+" at 52.239,116.051 h3 r90
CE3: Top Overlay "+" at 106.68,19.05 h2 r270
CE3a: Top Overlay "+" at 86.699,116.051 h3 r90
CE4a: Top Overlay "+" at 121.158,116.051 h3 r90
D1: Top Overlay "K" at 102.489,48.387 h1.02; Top Overlay "A" at 102.362,56.261 h1.02
DB1: Top Overlay "~" at 130.962,33.528 h1.52; Top Overlay "~" at 135.89,33.503 h1.52; Top Overlay "-" at 135.763,31.039 h1.52; Top Overlay "+" at 130.886,31.394 h1.52
DB1a: Top Overlay "-" at 118.339,97.968 h0.8 r180; Top Overlay "AC" at 132.385,97.917 h0.8 r180; Top Overlay "AC" at 123.342,97.917 h0.8 r180; Top Overlay "+" at 136.652,97.942 h0.8 r180
DB2: Top Overlay "~" at 125.501,45.085 h3; Top Overlay "+" at 125.501,58.191 h2 r270; Top Overlay "-" at 125.578,41.783 h2; Top Overlay "~" at 125.451,50.165 h3
Q1a: Top Overlay "C" at 66.167,7.366 h0.9 r90; Top Overlay "E" at 66.167,12.573 h0.9 r90; Top Overlay "B" at 66.167,10.033 h0.9 r90
Q2a: Top Overlay "C" at 66.167,26.416 h0.9 r90; Top Overlay "E" at 66.167,31.623 h0.9 r90; Top Overlay "B" at 66.167,29.083 h0.9 r90
Q3a: Top Overlay "C" at 65.786,46.736 h0.9 r90; Top Overlay "E" at 65.786,51.943 h0.9 r90; Top Overlay "B" at 65.786,49.403 h0.9 r90
RLY1: Top Overlay "NO" at 16.256,11.811 h1.5 r180; Top Overlay "C" at 18.796,10.541 h1.5 r180; Top Overlay "NC" at 22.86,11.811 h1.5 r180; Top Overlay "L1" at 36.253,7.406 h1.5 r180; Top Overlay "L2" at 36.195,14.859 h1.5 r180
RLY2: Top Overlay "L2" at 36.195,34.48 h1.5 r180; Top Overlay "L1" at 36.253,27.027 h1.5 r180; Top Overlay "NC" at 22.86,31.432 h1.5 r180; Top Overlay "C" at 18.796,30.162 h1.5 r180; Top Overlay "NO" at 16.256,31.432 h1.5 r180
RLY3: Top Overlay "L2" at 36.195,54.102 h1.5 r180; Top Overlay "L1" at 36.253,46.649 h1.5 r180; Top Overlay "NC" at 22.86,51.054 h1.5 r180; Top Overlay "C" at 18.796,49.784 h1.5 r180; Top Overlay "NO" at 16.256,51.054 h1.5 r180
TR1A: Top Overlay "3" at 61.227,74.845 h1 r90; Top Overlay "4" at 73.775,74.438 h1 r90; Top Overlay "1" at 73.724,79.976 h1 r90; Top Overlay "2" at 60.719,80.103 h1 r90
U1: Top Overlay "5" at 99.314,78.867 h1.02; Top Overlay "1" at 92.431,78.867 h1.02